# Altium PCB customteensypcb.PcbDoc (part 1 of 2)
Units mil, origin at the board's own origin, x right, y up, seen from the top; angles counter-clockwise.
Board outline 6000 x 4000 mil, 2 copper layers (Top Layer, Bottom Layer); 32 components, 60 nets, 197 pads, 41 vias.
Unrouted connection lines stored in the file: 2.
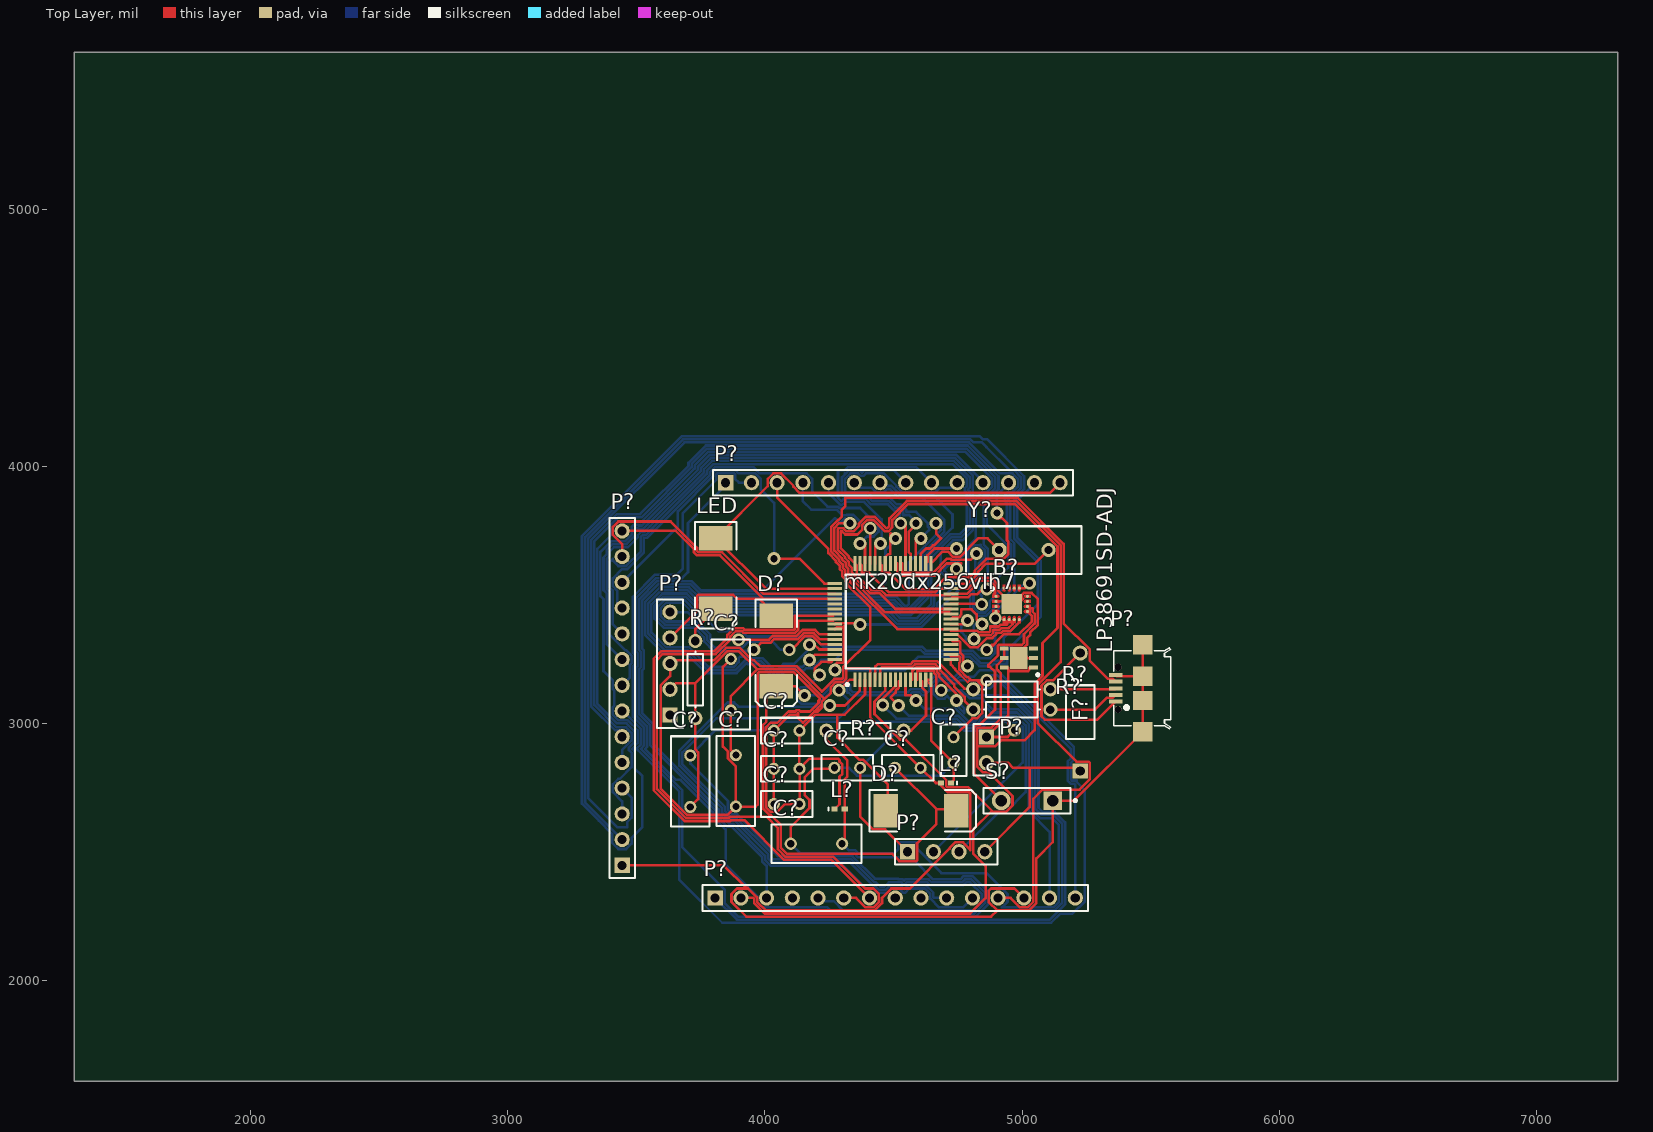
[diagram p0: Top Layer view]
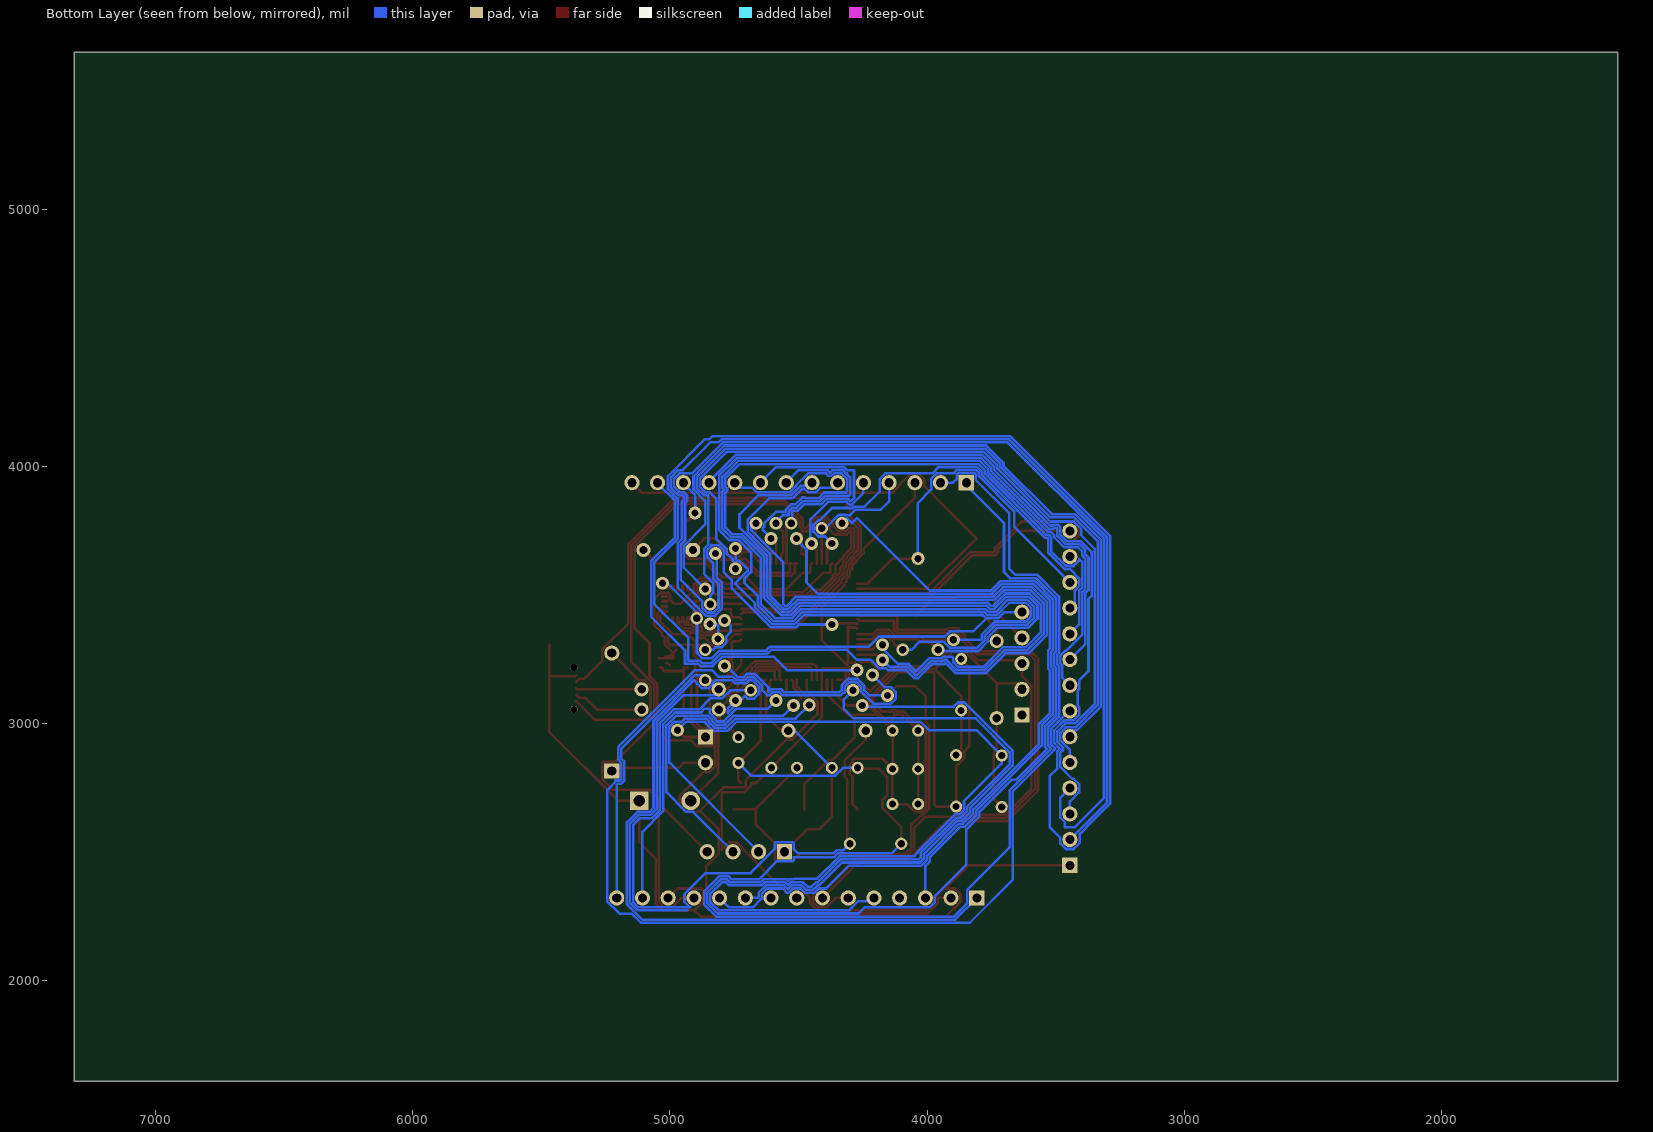
[diagram p1: Bottom Layer view, seen from below]

## Layer stack, top to bottom
Top Solder: solder mask 0.4, Solder Resist, Dk 3.5
Top Layer: signal copper 1.4
Dielectric 1: dielectric 12.6, FR-4, Dk 4.8
Bottom Layer: signal copper 1.4
Bottom Solder: solder mask 0.4, Solder Resist, Dk 3.5

## Board outline
1314.96,1610.24 7314.96,1610.24 7314.96,5610.24 1314.96,5610.24

## Design rules (kind name [scope] priority, off if disabled: settings)
Clearance [All] p1: gap=2 ignorepadtopadclearanceinfootprint=TRUE except(0: Arc-Hole Track-Hole SMDPad-Hole THPad-Hole Via-Hole Fill-Hole Poly-Hole Region-Hole Text-Hole)
PolygonConnect [All] p1: connectstyle=Relief reliefconductorwidth=10 reliefentries=4 polygonreliefangle="90 Angle" airgapwidth=10
RoomDefinition Teensy3.2 [InComponentClass('Teensy3.2')] p1: confinementstyle=ConfineIn formatcopy=TRUE lockcomponents=FALSE outline 2567.92,1549.22 6504.93,1549.22 6504.93,4462.61 2567.92,4462.61
RoutingVias [All] p1: holewidth=28 width=50 viastyle="Through Hole" minholewidth=28 minwidth=50 maxholewidth=28 maxwidth=50
SolderMaskExpansion [All] p1: expansion=4
Width [All] p1: maxlimit=10 minlimit=10 preferedwidth=10
30 further rules are at their usual default settings.

## Classes and differential pairs
component class Teensy3.2: B? C? D? F? L? LED LP38691SD-ADJ mk20dx256vlh7 P? R? S? Y?

## Components (designator, comment, footprint, x,y, rotation, side; value= is the part's Value field where it differs from the comment)
B? "MKL02Z32VFG4" QFN50P300X300X65-17N-D 4959.18,3465.83 r0 top
C? "Cap Pol1" RAD-0.1 4319.89,2828.75 r180 top value=0.1uF
C? "Cap Pol1" RAD-0.2 3886.82,2777.96 r90 top value=2.2uF
C? "Cap Pol1" RAD-0.2 3867.13,3151.98 r270 top value=2.2uF
C? "Cap Pol1" RAD-0.1 4555.32,2828.75 r0 top value=0.1uF
C? "Cap Pol1" RAD-0.2 3709.65,2776.39 r270 top value=2.2uF
C? "Cap Pol1" RAD-0.1 4084.46,2973.24 r180 top value=0.1uF
C? "Cap Pol1" RAD-0.1 4084.46,2687.8 r180 top value=0.1uF
C? "Cap Pol1" RAD-0.2 4200.21,2533.47 r180 top value=2.2uF
C? "Cap Pol1" RAD-0.1 4733.28,2897.65 r270 top value=0.1uF
C? "Cap Pol1" RAD-0.1 4084.46,2824.81 r180 top value=0.1uF
D? "Diode" SMC 4606.31,2661.42 r0 top
D? "Diode" SMC 4044.3,3282.49 r270 top
F? "Fuse 2" PIN-W2/E2.8 5225.4,3045.28 r90 top
L? "Ferrite Inductor" 0402-A 4703.75,2769.69 r180 top value=10mH
L? "Ferrite Inductor" 0402-A 4290.36,2668.12 r0 top value=10mH
LED "Diode" SMC 3808.08,3584.06 r270 top
LP38691SD-ADJ "LP38691SD-ADJ" SON95P300X300X80-7N 4986.59,3255.34 r180 top
mk20dx256vlh7 "mk20dx256vlh7" QFP50P1200X1200X160-64N 4497.06,3396.94 r90 top
P? "Header 5" HDR1X5 3630.91,3033.87 r90 top
P? "Header 14" HDR1X14 3847.25,3937.02 r0 top
P? "Header 15" HDR1X15 3806.31,2322.84 r0 top
P? "Header 14" HDR1X14 3444.88,2449.61 r90 top
P? "Header 4" HDR1X4 4554.54,2502.37 r0 top
P? "MicroUSB" 629105136821 5460.64,3137.8 r90 top
P? "Jumper Normally Close" HDR1X2 4861.23,2948.43 r270 top
R? "Res1" AXIAL-0.3 4388.79,2973.24 r0 top value=470
R? "Res1" AXIAL-0.3 4959.65,3133.87 r180 top value=33
R? "Res1" AXIAL-0.3 4959.65,3055.13 r180 top value=33
R? "Res1" AXIAL-0.3 3729.34,3171.66 r90 top value=470
S? "SW-PB" SPST-2 5018.71,2700.79 r180 top
Y? "ECS-10-13-1" HC-49U 5006.5,3675.2 r0 top

## Footprints (in the part's own frame and the unit in brackets; to place one, negate y for a bottom-side part, rotate by r counter-clockwise, add the part's x,y. Pads: shape width x height; smd on the part's side, far side on the other; paste and mask are expansions set on the pad)
0402-A [mm] "Chip Inductor, Body 1.0x0.5mm, IPC High Density"
  rect 0.6x0.5 smd: 1(-0.5,0) 2(0.5,0)
  silkscreen extent -1.1,-0.15 -1.1,0.15, body extent -0.55,-0.3 0.55,0.3, height 0.55
629105136821 [mm] "Micro USB 2.0 SMT Type B Horizontal 5 Contacts"
  rect 0.4x1.35 smd: 1(-1.3,2.475) 2(-0.65,2.475) 3(0,2.475) 4(0.65,2.475) 5(1.3,2.475)
  rect 1.9x1.9 smd: Shell(-4.3,-0.2) Shell(-1.2,-0.2) Shell(1.2,-0.2) Shell(4.3,-0.2)
  round 0.7 hole 0.7 unplated: ""(-2.075,2.25) ""(2.075,2.25)
  silkscreen extent -4,-2.95 4,2.65, body extent -4,-2.95 4,2.97, height 2.75
AXIAL-0.3 [mm] "Axial Device, Thru-Hole; 2 Leads; 0.3 in Pin Spacing"
  round 1.4 hole 0.85: 1(-3.81,0) 2(3.81,0)
  silkscreen extent -2.77,-0.76 2.77,0.76
HC-49U [mm] "Quartz Crystal, Thru-Hole; 2 Leads; Body 11.35 x 4.65 x 13.46 mm (LxWxH max)"
  oct 1.4x1.4 hole 0.8: 1(-2.44,0)
  round 1.4 hole 0.8: 2(2.44,0)
  silkscreen extent -5.7,-2.35 5.7,2.35
HDR1X2 [mm] "Connector; Header; 2 Position"
  rect 1.5x1.5 hole 0.9: 1(0,0)
  round 1.5 hole 0.9: 2(2.54,0)
  silkscreen extent -1.27,-1.27 3.81,1.27
HDR1X4 [mm] "Connector; Header; 4 Position"
  rect 1.5x1.5 hole 0.9: 1(0,0)
  round 1.5 hole 0.9: 2(2.54,0) 3(5.08,0) 4(7.62,0)
  silkscreen extent -1.27,-1.27 8.89,1.27
HDR1X5 [mm] "Connector; Header; 5 Position"
  rect 1.5x1.5 hole 0.9: 1(0,0)
  round 1.5 hole 0.9: 2(2.54,0) 3(5.08,0) 4(7.62,0) 5(10.16,0)
  silkscreen extent -1.27,-1.27 11.43,1.27
HDR1X14 [mm] "Connector; Header; 14 Position"
  rect 1.5x1.5 hole 0.9: 1(0,0)
  round 1.5 hole 0.9: 2(2.54,0) 3(5.08,0) 4(7.62,0) 5(10.16,0) 6(12.7,0) 7(15.24,0) 8(17.78,0) 9(20.32,0) 10(22.86,0) 11(25.4,0) 12(27.94,0) 13(30.48,0) 14(33.02,0)
  silkscreen extent -1.27,-1.27 34.29,1.27
HDR1X15 [mm] "Connector; Header; 15 Position"
  rect 1.5x1.5 hole 0.9: 1(0,0)
  round 1.5 hole 0.9: 2(2.54,0) 3(5.08,0) 4(7.62,0) 5(10.16,0) 6(12.7,0) 7(15.24,0) 8(17.78,0) 9(20.32,0) 10(22.86,0) 11(25.4,0) 12(27.94,0) 13(30.48,0) 14(33.02,0) 15(35.56,0)
  silkscreen extent -1.27,-1.27 36.83,1.27
PIN-W2/E2.8 [mm] "Thru-Hole; 2 Leads"
  rect 1.5x1.5 hole 0.9: 1(-5.825,0)
  round 1.5 hole 0.9: 2(5.825,0)
  silkscreen extent -2.65,-1.4 2.65,1.4
QFN50P300X300X65-17N-D [mm]
  round 0.3 smd: 1(-1.55,0.75) 2(-1.55,0.25) 3(-1.55,-0.25) 4(-1.55,-0.75) 5(-0.75,-1.55) 6(-0.25,-1.55) 7(0.25,-1.55) 8(0.75,-1.55) 9(1.55,-0.75) 10(1.55,-0.25) 11(1.55,0.25) 12(1.55,0.75) 13(0.75,1.55) 14(0.25,1.55) 15(-0.25,1.55) 16(-0.75,1.55)
  rrect0% 2x2 smd: 17(0,0)
  Top Layer region: -0.6,1.9 -0.588,1.35 -0.635,1.235 -0.75,1.188 -0.865,1.235 -0.912,1.35 -0.9,1.35 -0.9,1.9 -0.6,1.9
  Top Layer region: -0.1,1.9 -0.088,1.35 -0.135,1.235 -0.25,1.188 -0.365,1.235 -0.412,1.35 -0.4,1.35 -0.4,1.9 -0.1,1.9
  Top Layer region: 0.4,1.9 0.412,1.35 0.365,1.235 0.25,1.188 0.135,1.235 0.088,1.35 0.1,1.35 0.1,1.9 0.4,1.9
  Top Layer region: 0.9,1.9 0.912,1.35 0.865,1.235 0.75,1.188 0.635,1.235 0.588,1.35 0.6,1.35 0.6,1.9 0.9,1.9
  Top Layer region: 1.9,0.6 1.35,0.588 1.235,0.635 1.188,0.75 1.235,0.865 1.35,0.912 1.35,0.9 1.9,0.9 1.9,0.6
  Top Layer region: 1.9,0.1 1.35,0.088 1.235,0.135 1.188,0.25 1.235,0.365 1.35,0.412 1.35,0.4 1.9,0.4 1.9,0.1
  Top Layer region: 1.9,-0.4 1.35,-0.412 1.235,-0.365 1.188,-0.25 1.235,-0.135 1.35,-0.088 1.35,-0.1 1.9,-0.1 1.9,-0.4
  Top Layer region: 1.9,-0.9 1.35,-0.912 1.235,-0.865 1.188,-0.75 1.235,-0.635 1.35,-0.588 1.35,-0.6 1.9,-0.6 1.9,-0.9
  Top Layer region: 0.6,-1.9 0.588,-1.35 0.635,-1.235 0.75,-1.188 0.865,-1.235 0.912,-1.35 0.9,-1.35 0.9,-1.9 0.6,-1.9
  Top Layer region: 0.1,-1.9 0.088,-1.35 0.135,-1.235 0.25,-1.188 0.365,-1.235 0.412,-1.35 0.4,-1.35 0.4,-1.9 0.1,-1.9
  Top Layer region: -0.4,-1.9 -0.412,-1.35 -0.365,-1.235 -0.25,-1.188 -0.135,-1.235 -0.088,-1.35 -0.1,-1.35 -0.1,-1.9 -0.4,-1.9
  Top Layer region: -0.9,-1.9 -0.912,-1.35 -0.865,-1.235 -0.75,-1.188 -0.635,-1.235 -0.588,-1.35 -0.6,-1.35 -0.6,-1.9 -0.9,-1.9
  Top Layer region: -1.9,-0.6 -1.35,-0.588 -1.235,-0.635 -1.188,-0.75 -1.235,-0.865 -1.35,-0.912 -1.35,-0.9 -1.9,-0.9 -1.9,-0.6
  Top Layer region: -1.9,-0.1 -1.35,-0.088 -1.235,-0.135 -1.188,-0.25 -1.235,-0.365 -1.35,-0.412 -1.35,-0.4 -1.9,-0.4 -1.9,-0.1
  Top Layer region: -1.9,0.4 -1.35,0.412 -1.235,0.365 -1.188,0.25 -1.235,0.135 -1.35,0.088 -1.35,0.1 -1.9,0.1 -1.9,0.4
  Top Layer region: -1.9,0.9 -1.35,0.912 -1.235,0.865 -1.188,0.75 -1.235,0.635 -1.35,0.588 -1.35,0.6 -1.9,0.6 -1.9,0.9
  silkscreen extent -2.02,1.38 -1.77,1.62
QFP50P1200X1200X160-64N [mm]
  rect 1.475x0.3 smd: 1(-5.738,3.75) 2(-5.738,3.25) 3(-5.738,2.75) 4(-5.738,2.25) 5(-5.738,1.75) 6(-5.738,1.25) 7(-5.738,0.75) 8(-5.738,0.25) 9(-5.738,-0.25) 10(-5.738,-0.75) 11(-5.738,-1.25) 12(-5.738,-1.75) 13(-5.738,-2.25) 14(-5.738,-2.75) 15(-5.738,-3.25) 16(-5.738,-3.75) 33(5.738,-3.75) 34(5.738,-3.25) 35(5.738,-2.75) 36(5.738,-2.25) 37(5.738,-1.75) 38(5.738,-1.25) 39(5.738,-0.75) 40(5.738,-0.25) 41(5.738,0.25) 42(5.738,0.75) 43(5.738,1.25) 44(5.738,1.75) 45(5.738,2.25) 46(5.738,2.75) 47(5.738,3.25) 48(5.738,3.75)
  rect 0.3x1.475 smd: 17(-3.75,-5.738) 18(-3.25,-5.738) 19(-2.75,-5.738) 20(-2.25,-5.738) 21(-1.75,-5.738) 22(-1.25,-5.738) 23(-0.75,-5.738) 24(-0.25,-5.738) 25(0.25,-5.738) 26(0.75,-5.738) 27(1.25,-5.738) 28(1.75,-5.738) 29(2.25,-5.738) 30(2.75,-5.738) 31(3.25,-5.738) 32(3.75,-5.738) 49(3.75,5.738) 50(3.25,5.738) 51(2.75,5.738) 52(2.25,5.738) 53(1.75,5.738) 54(1.25,5.738) 55(0.75,5.738) 56(0.25,5.738) 57(-0.25,5.738) 58(-0.75,5.738) 59(-1.25,5.738) 60(-1.75,5.738) 61(-2.25,5.738) 62(-2.75,5.738) 63(-3.25,5.738) 64(-3.75,5.738)
  silkscreen extent -6.35,-4.65 4.65,4.65
RAD-0.1 [mm] "Radial Cap, Thru-Hole; 2 Leads; 0.1 in Pin Spacing"
  round 1.2 hole 0.7: 1(-1.27,0) 2(1.27,0)
  silkscreen extent -2.54,-1.27 2.54,1.27
RAD-0.2 [mm] "Radial Cap, Thru-Hole; 2 Leads; 0.2 in Pin Spacing"
  round 1.2 hole 0.7: 1(-2.54,0) 2(2.54,0)
  silkscreen extent -4.44,-1.91 4.44,1.91
SMC [mm] "DO-214-AB/SMC; 2 C-Bend Leads; Body 7.9 x 5.9 mm, inc. leads (LxW)"
  rect 2.4x3.3 smd: 1(-3.475,0) 2(3.475,0)
  silkscreen extent -5.07,-2.05 5.43,2.05
SON95P300X300X80-7N [mm]
  rect 0.85x0.4 smd: 1(-1.45,0.95) 2(-1.45,0) 3(-1.45,-0.95) 4(1.45,-0.95) 5(1.45,0) 6(1.45,0.95)
  rect 1.7x2.2 smd: 7(0,0)
  silkscreen extent -2,1.53 -1.75,1.77
SPST-2 [mm] "Switch; 2 Leads"
  rect 1.85x1.85 hole 1.1: 1(-2.54,0)
  round 1.85 hole 1.1: 2(2.54,0)
  silkscreen extent -4.89,-1.27 4.28,1.27

## Part data
B?: "Freescale MKL02Z32VFG4, 32bit ARM Cortex M0 Microcontroller, 48MHz, 32 kB Flash, 16-Pin QFN", Manufacturer_Name=Nexperia, RS Part Number=7884723, Datasheet Link=http://cache.nxp.com/files/32bit/doc/data_sheet/KL02P32M48SF0.pdf, Geometry.Height=0.65mm, Manufacturer_Part_Number=MKL02Z32VFG4, Supplier_Name=RS
C? C? C? C? C? C? C? C? C? C?: "Polarized Capacitor (Radial)", LatestRevisionDate=17-Jul-2002, LatestRevisionNote="Re-released for DXP Platform.", PackageDescription="Polarized Capacitor (Radial); 2 Leads", PackageReference=RB7.6-15, Published=8-Jun-2000, Publisher="Altium Limited"
D? D? LED: "Default Diode", Code_JEDEC=DO-214-AB, LatestRevisionDate=17-Jul-2002, LatestRevisionNote="Re-released for DXP Platform.", PackageDescription="DO-214-AB/SMC; 2 C-Bend Leads; Body 7.9 x 5.9 mm, inc. leads (LxW)", PackageReference=SMC, PackageVersion=Sep-1996, Published=8-Jun-2000, Publisher="Altium Limited"
F?: "Fuse", LatestRevisionDate=17-Jul-2002, LatestRevisionNote="Re-released for DXP Platform.", PackageDescription="Thru-Hole; 2 Leads", PackageReference=PIN-W2/E2.8, Published=8-Jun-2000, Publisher="Altium Limited"
L? L?: library part Inductor, "Inductor", Code_IEC=1005, Code_JEITA=0402, LatestRevisionDate=29-May-2009, LatestRevisionNote="IPC-7351 Footprint Added.", PackageDescription="Chip Inductor", PackageReference=0402-A, Published=8-Jun-2000, Publisher="Altium Limited"
LP38691SD-ADJ: "500mA LDO Regulator Adj.,LP38691SD-ADJ", Manufacturer_Name="Texas Instruments", Mouser Part Number=926-LP38691SD-ADJ, Datasheet Link=http://www.ti.com/lit/ds/symlink/lp38691-adj.pdf, Geometry.Height=0.8mm, Manufacturer_Part_Number=LP38691SD-ADJ, Supplier_Name=Mouser
mk20dx256vlh7: "MK20DX256VLH7, ARM Cortex M4 MCU 72MHz 256 kB Flash, 64 kB RAM, USB CAN I2C 64-Pin LQFP", Manufacturer_Name=Nexperia, RS Part Number=7862120P, Datasheet Link=https://www.pjrc.com/teensy/K20P64M72SF1.pdf, Geometry.Height=1.6mm, Manufacturer_Part_Number=mk20dx256vlh7, Supplier_Name=RS
P?: "Header, 5-Pin", LatestRevisionDate=17-Jul-2002, LatestRevisionNote="Re-released for DXP Platform.", Publisher="Altium Limited"
P? P?: "Header, 14-Pin", LatestRevisionDate=17-Jul-2002, LatestRevisionNote="Re-released for DXP Platform.", Publisher="Altium Limited"
P?: "Header, 15-Pin", LatestRevisionDate=17-Jul-2002, LatestRevisionNote="Re-released for DXP Platform.", Publisher="Altium Limited"
P?: "Header, 4-Pin", LatestRevisionDate=17-Jul-2002, LatestRevisionNote="Re-released for DXP Platform.", Publisher="Altium Limited"
P?: library part 629105136821, "Micro USB 2.0 SMT Type B Horizontal 5 Contacts WR-COM", ComponentLink1Description=Manufacturer, ComponentLink1URL=http://www.we-online.de, ComponentLink2Description=Datasheet, ComponentLink2URL=http://katalog.we-online.de/em/datasheet/629105136821.pdf, Construction=SMT, Gender=Receptacle, Interface Type="Type B", Part Number=629105136821, Published Date="April 2017", Publisher="Wurth Elektronik", Sub-Family="Micro USB 2.0", Type=Horizontal
P?: library part "Header 2", "Header, 2-Pin", LatestRevisionDate=17-Jul-2002, LatestRevisionNote="Re-released for DXP Platform.", Publisher="Altium Limited"
R? R? R? R?: "Resistor", LatestRevisionDate=17-Jul-2002, LatestRevisionNote="Re-released for DXP Platform.", PackageDescription="Axial Device, Thru-Hole; 2 Leads; 0.3 in Pin Spacing", PackageReference=AXIAL-0.3, Published=8-Jun-2000, Publisher="Altium Limited"
S?: "Switch", LatestRevisionDate=17-Jul-2002, LatestRevisionNote="Re-released for DXP Platform.", PackageDescription="Switch; 2 Leads", PackageReference=SPST-2, Published=24-Mar-1999, Publisher="Altium Limited"
Y?: "Crystal Oscillator", ComponentLink1Description="Manufacturer Link", ComponentLink1URL=http://www.ecsxtal.com/, ComponentLink2Description=Datasheet, ComponentLink2URL=http://www.ecsxtal.com/pdf2/HC49U.PDF, DatasheetDocument=18-Apr-2000, PackageReference=HC-49U, Published=17-Jul-2002, Publisher="Altium Limited"

## Via types
v1: diameter 50, hole 28, Top Layer to Bottom Layer, 41 vias

## Nets (pads, with @x,y where several pads share a name; then routed paths per layer and width w, separated by ;. In a path a pad name is that pad's centre, name@x,y a point inside that pad or via, vN(x,y) a via of type N, cw(c..) or ccw(c..) an arc to the next point about the centre after c; other vN are vias at no path point)
3.3v: B?.1 C?.1@3867.13,3251.98 C?.1@3886.82,2677.96 C?.1@4134.46,2687.8 C?.1@4134.46,2824.81 C?.1@4134.46,2973.24 D?.1@4469.5,2661.42 L?.1@4270.68,2668.12 LP38691SD-ADJ.4 LP38691SD-ADJ.5 mk20dx256vlh7.3 mk20dx256vlh7.7 mk20dx256vlh7.30 mk20dx256vlh7.48 P?.2@3906.31,2322.84 P?.3@3630.91,3233.87 P?.3@4047.25,3937.02 | length 12218.7
  Top Layer w10: C?.1@3867.13,3251.98 3836.51,3221.35 3836.51,2911.3 3856.2,2891.61 3856.2,2865.28 3886.82,2834.65 C?.1@3886.82,2677.96 ; P?.2@3906.31,2322.84 3954.65,2322.84 3957.78,2319.71 3957.78,2302.74 3998.21,2262.31 4797.44,2262.31 4857.78,2322.66 4857.78,2447.47 4809.36,2495.88 4809.36,2589.2 4881.89,2661.73 ; P?.3@4047.25,3937.02 4047.25,3878.78 4246.06,3679.97 4246.06,3663 4276.01,3633.05 4276.01,3628.37 4290.08,3614.3 4290.08,3602.01 4300.51,3591.58 4300.51,3572.87 4312.16,3561.23 4312.16,3554.84 4319.19,3547.81 4319.19,3541.38 4409.45,3451.12 4409.45,3325.79 4303.65,3219.99 4303.65,3179.33 4298.26,3173.93 4269.97,3173.93 4221.03,3124.99 4122.1,3223.92 3980.8,3223.92 3958.33,3246.39 3950.93,3246.39 3902.73,3294.6 3849.48,3294.6 3801.28,3246.39 3643.44,3246.39 P?.3@3630.91,3233.87 3630.91,3185.52 3594.39,3149 3594.39,2748.35 3696.97,2645.76 3854.62,2645.76 C?.1@3886.82,2677.96 ; L?.1@4270.68,2668.12 4289.61,2687.05 4289.61,2794.27 4300.51,2805.17 4300.51,2841.43 4289.61,2852.33 4289.61,2858.69 4284.09,2864.22 4172.29,2864.22 C?.1@4133.67,2825.6 ; mk20dx256vlh7.3@4388.79,3171.03 4388.79,3114.18 4310.05,3035.44 4280.52,3035.44 ; mk20dx256vlh7.7@4467.53,3171.03 4467.53,3128.33 4425.69,3086.49 4425.69,3037.46 4524.47,2938.68 4546.63,2938.68 4704.62,2780.69 4704.62,2756.95 4708.72,2752.85 4790.77,2752.85 4881.89,2661.73 ; D?.1@4477.37,2668.12 4477.37,2764.57 4382.57,2859.37 4368.01,2859.37 4281.35,2946.03 4281.35,2991.69 4280.52,2992.52 4280.52,3035.44 ; B?.1@4898.16,3495.36 4890.24,3505.2 4894.19,3509.16 4894.19,3536.87 4875.45,3555.61 4836.63,3555.61 4786.22,3505.2 mk20dx256vlh7.30@4722.96,3505.2 4717.38,3499.62 4470.36,3499.62 4450.1,3519.88 4413.44,3519.88 4367.19,3566.14 4367.19,3575.82 4356.2,3586.81 4356.2,3616.06 mk20dx256vlh7.48@4349.42,3622.84 4326.08,3646.18 4326.08,3650.87 4294.06,3682.88 4294.06,3747.85 4300.16,3747.85 4312.48,3735.53 4359.56,3735.53 4377.44,3753.4 4377.44,3773.09 4396.19,3791.84 4422.69,3791.84 4466.68,3747.85 4479.37,3747.85 4495.55,3764.03 4495.55,3792.77 4556.73,3853.95 4972.69,3853.95 5137.13,3689.52 5137.13,3372.2 5078.86,3313.93 5078.86,3185.89 5048.24,3155.26 5048.24,2974.81 5008.87,2935.44 4917.19,2935.44 4893.66,2911.91 4828.8,2911.91 4824.7,2916.01 ; LP38691SD-ADJ.4@4929.51,3292.75 LP38691SD-ADJ.5@4929.51,3255.34 4901.58,3227.42 4901.58,3211.81 4905.77,3207.62 4905.77,3207.17 4917.22,3195.72 4917.22,3021.4 4880.79,2984.96 4828.8,2984.96 4824.7,2980.86 4824.7,2916.01 ; C?.1@3886.82,2677.96 3963.98,2677.96 3972.34,2686.31 3972.34,3195.82 3976.44,3199.92 4112.16,3199.92 4212.6,3099.48 4212.6,3093.72 4207.97,3089.09 4207.97,3080.69 4174.72,3047.44 4138.45,3047.44 4133.23,3052.66 4123.29,3052.66 4118.07,3047.44 4091.69,3047.44 4048.11,3003.86 4021.77,3003.86 4003.83,2985.92 4003.83,2675.12 4021.77,2657.18 4047.14,2657.18 4077.76,2687.8 C?.1@4134.46,2687.8 C?.1@4134.46,2824.81 C?.1@4133.67,2825.6 ; C?.1@4133.67,2825.6 4133.67,2972.45 C?.1@4134.46,2973.24 4196.66,3035.44 4280.52,3035.44 ; 4824.7,2916.01 4824.7,2833.3 4846.1,2811.91 4869,2811.91 4962.13,2718.78 4962.13,2682.81 4936.69,2657.38 4886.24,2657.38 4881.89,2661.73
GND: B?.2 B?.17 C?.2@3709.65,2676.39 C?.2@3867.13,3051.98 C?.2@3886.82,2877.96 C?.2@4034.46,2687.8 C?.2@4034.46,2824.81 C?.2@4034.46,2973.24 C?.2@4605.32,2828.75 L?.2@4684.06,2769.69 LP38691SD-ADJ.2 LP38691SD-ADJ.7 mk20dx256vlh7.4 mk20dx256vlh7.31 mk20dx256vlh7.47 P?.1@3444.88,2449.61 P?.2@3630.91,3133.87 P?.5@5363.2,3188.98 P?.13@5006.31,2322.84 P?.Shell R?.1@3729.34,3021.66 S?.1 | length 9287.8
  Top Layer w10: P?.1@3444.88,2449.61 3839.19,2449.61 3929.42,2359.37 ; P?.2@3630.91,3133.87 3654.53,3157.49 3729.34,3157.49 ; C?.2@3709.65,2676.39 3740.28,2707.01 3740.28,2889.07 3729.34,2900.01 R?.1@3729.34,3021.66 3729.34,3157.49 ; C?.2@3886.82,2877.96 3867.13,2897.65 C?.2@3867.13,3051.98 3867.13,3107.59 3971.47,3211.92 ; C?.2@4034.46,2687.8 4033.67,2688.59 4033.67,2825.6 4034.46,2826.39 C?.2@4034.46,2973.24 4096.66,3035.44 4123.04,3035.44 4128.26,3040.66 4128.26,3022.74 ; mk20dx256vlh7.47@4369.1,3622.84 4375.88,3616.06 4375.88,3586.81 4405.14,3586.81 4480.32,3511.62 4662.14,3511.62 4675.41,3524.89 mk20dx256vlh7.31@4722.96,3524.89 4788.94,3524.89 4831.66,3567.61 4880.42,3567.61 4906.19,3541.84 4906.19,3518.82 B?.17@4949.34,3475.68 ; 4797.36,2507.88 4797.36,2511.2 ; B?.2@4898.16,3475.68 B?.17@4949.34,3475.68 ; LP38691SD-ADJ.7@4973.98,3288.28 LP38691SD-ADJ.7@4986.59,3275.67 ; LP38691SD-ADJ.7@5000.01,3228.35 5003.36,3230.63 LP38691SD-ADJ.7@5011.42,3236.1 ; P?.13@5006.31,2336.23 P?.13@5006.31,2322.84 4969.78,2359.37 4879.06,2359.37 4869.78,2350.09 4869.78,2307.71 4903.18,2274.31 ; LP38691SD-ADJ.7@5018.16,3260.56 5004.99,3262.48 5003.82,3262.65 4998.89,3263.38 LP38691SD-ADJ.7@4986.59,3275.67 ; LP38691SD-ADJ.2@5043.68,3255.34 LP38691SD-ADJ.7@4986.59,3255.34 LP38691SD-ADJ.7@4986.59,3275.67 ; P?.5@5363.2,3188.98 5367.13,3185.05 P?.Shell@5468.51,3185.05 ; P?.Shell@5468.51,3307.09 P?.Shell@5468.51,3185.05 ; 3729.34,3157.49 3854.45,3282.6 3897.76,3282.6 3968.43,3211.92 3971.47,3211.92 ; 3929.42,2359.37 3891.18,2359.37 3869.78,2337.97 3869.78,2307.71 3927.18,2250.31 4879.18,2250.31 4903.18,2274.31 ; 3929.42,2359.37 3932.26,2362.2 3969.78,2324.68 3969.78,2307.71 4003.18,2274.31 4426.41,2274.31 4454.84,2302.74 4454.84,2323.03 4491.18,2359.37 4563.19,2359.37 4718.01,2514.18 4718.01,2517.5 4739.41,2538.9 4769.67,2538.9 4797.36,2511.2 ; 3971.47,3211.92 4117.13,3211.92 4232.28,3096.77 4232.28,3096.44 ; 4128.26,3022.74 4147.14,3003.86 4148.11,3003.86 4166.99,3022.74 ; 4128.26,3022.74 4166.99,3022.74 ; 4166.99,3022.74 4191.69,3047.44 ; 4191.69,3047.44 4205.71,3047.44 4219.97,3061.7 4219.97,3075.72 ; 4191.69,3047.44 4219.97,3075.72 ; 4219.97,3075.72 4219.97,3084.12 4232.28,3096.44 ; 4232.28,3096.44 4256.2,3120.35 4256.2,3143.18 4274.94,3161.93 4301.45,3161.93 4302.34,3161.04 4315.65,3174.36 4315.65,3215.02 4315.7,3215.07 4406.01,3215.07 4408.47,3212.61 mk20dx256vlh7.4@4408.47,3171.03 4408.47,3134.18 4408.79,3133.87 4408.79,3025.28 C?.2@4605.32,2828.75 4664.38,2769.69 L?.2@4684.06,2769.69 4684.06,2760.54 4711.22,2733.39 4793.26,2733.39 4797.36,2729.28 4797.36,2511.2 ; 4903.18,2274.31 5026.41,2274.31 5054.84,2302.74 5054.84,2476.09 5118.71,2539.97 S?.1@5118.71,2700.79 5200.8,2700.79 P?.Shell@5468.51,2968.51 P?.Shell@5468.51,3090.56 P?.Shell@5468.51,3185.05 ; B?.17@4949.34,3475.68 B?.17@4959.18,3465.83 4983.55,3465.83 5003.23,3485.52 4998.94,3485.52 4998.94,3500.91 5006.78,3508.75 5036.4,3508.75 5060.62,3484.53 5060.62,3384.74 5030.82,3354.94 5030.82,3345 5018.86,3333.03 5018.86,3307.93 LP38691SD-ADJ.7@4986.59,3275.67
NetB?_4: B?.4 B?.13 mk20dx256vlh7.34 P?.5@3630.91,3433.87 | length 3171.2
  Top Layer w10: mk20dx256vlh7.34@4625.01,3622.84 4631.79,3629.62 4631.79,3654.78 4658.11,3681.1 v1(4744.09,3681.1) ; v1(4895.32,3409.89) 4892.04,3409.89 4881.89,3420.04 B?.4@4898.16,3436.31 ; B?.13@4988.71,3526.86 5009.36,3526.86 v1(5028.66,3546.16)
  Bottom Layer w10: P?.5@3630.91,3433.87 3643.44,3433.87 3643.44,3430.95 3644.58,3429.82 3648.1,3433.34 3700.48,3433.34 3724.48,3409.34 3769.78,3409.34 ; v1(4744.09,3681.1) 4744.09,3639.49 4738.97,3634.36 4730.84,3634.36 4697.49,3601.01 4697.49,3592.88 4745.58,3544.79 4669.67,3468.88 4669.67,3454.63 4601.44,3386.39 4514.71,3386.39 4479.76,3421.34 3781.78,3421.34 3769.78,3409.34 ; v1@5008.98,3546.16 4890.79,3427.97 4895.32,3423.44 v1(4895.32,3409.89) 4894.19,3411.01 4894.19,3274.14 4875.45,3255.39 4835.6,3255.39 4806.65,3284.34 4625.65,3284.34 4610.59,3299.4 4226.17,3299.4 4186.48,3339.09 3930.58,3339.09 3910.89,3358.77 3820.35,3358.77 3769.78,3409.34
NetB?_6: B?.6 mk20dx256vlh7.23 P?.4@5363.2,3163.39 | length 2676.9
  Top Layer w10: B?.6@4949.34,3404.81 4942.56,3398.03 4942.56,3388.13 4938.46,3384.03 4914.72,3384.03 4908.57,3377.89 4882.06,3377.89 4880.3,3379.65 4875.71,3379.65 4875.71,3359.02 4872.65,3355.96 4830.46,3355.96 4825.27,3361.14 4722.96,3361.14 mk20dx256vlh7.23@4722.96,3367.41 4515,3367.41 4331.19,3551.23 4331.19,3560.91 4321.28,3570.81 4319.54,3570.81 4312.51,3577.84 4312.51,3596.55 4302.08,3606.98 4302.08,3619.27 4288.01,3633.34 4288.01,3638.03 4258.06,3667.97 4258.06,3765.94 4284.26,3792.14 4285.2,3792.14 4298.7,3805.64 4298.7,3832.14 4312.2,3845.64 4312.2,3877.95 4982.63,3877.95 5161.13,3699.46 5161.13,3390.55 5261.93,3289.74 5261.93,3245.9 5333.72,3174.11 5352.48,3174.11 P?.4@5363.2,3163.39
NetB?_7: B?.7 mk20dx256vlh7.25 | length 477.3
  Top Layer w10: mk20dx256vlh7.25@4722.96,3406.78 4729.74,3413.56 4754.9,3413.56 4759,3417.66 4759,3420.41 4763.78,3425.2 4763.78,3444.88 4803.15,3444.88 4822.83,3425.2 4822.83,3405.51 4840.39,3387.96 v1(4843.71,3387.96) v1@4843.71,3404.32 ; v1@4822.54,3331.4 4824.29,3331.4 4836.85,3343.96 4877.62,3343.96 4887.71,3354.05 4887.71,3365.53 4913.19,3365.53 4919.69,3372.03 4947.53,3372.03 4962.24,3386.75 4962.24,3398.03 B?.7@4969.02,3404.81
  Bottom Layer w10: v1(4812.02,3329.14) 4812.02,3380.17 4819.8,3387.96 v1(4843.71,3387.96)
NetB?_8: B?.8 mk20dx256vlh7.22 | length 336.2
  Top Layer w10: mk20dx256vlh7.22@4722.96,3347.72 4748.18,3347.72 4798.76,3297.14 4826.69,3297.14 4861.5,3331.96 4882.59,3331.96 ; 4885.06,3334.43 4899.71,3349.08 4899.71,3353.53 4918.16,3353.53 4924.66,3360.03 4953.83,3360.03 4988.71,3394.91 B?.8@4988.71,3404.81
NetB?_9: B?.9 mk20dx256vlh7.24 | length 629.9
  Top Layer w10: mk20dx256vlh7.24@4722.96,3387.09 4771.54,3387.09 4772.65,3388.2 v1@4792.33,3388.2 ; v1@4857.69,3285.14 4859.06,3286.51 v1@4859.2,3286.51 ; v1@4862.2,3283.31 v1@4862.2,3283.51 ; 4881.91,3307.09 v1(4862.19,3287.39) ; 4885.76,3307.09 v1@4866.07,3287.39 ; B?.9@5020.2,3436.31 5036.62,3419.89 5036.62,3396.27 4988.39,3348.03 4929.63,3348.03 4868.11,3286.51 v1@4865.19,3286.51 ; v1@4859.2,3286.51 v1@4862.19,3283.52 ; v1@4859.2,3286.51 v1@4862.19,3286.51 ; v1@4862.19,3283.52 v1@4862.19,3286.51 ; v1@4862.2,3286.51 v1@4865.19,3286.51 ; v1@4862.19,3286.51 v1(4862.19,3287.39) ; v1@4862.2,3286.51 4862.2,3283.53 v1@4865.19,3286.51 ; v1@4862.2,3286.51 v1(4862.19,3287.39) ; v1(4862.19,3287.39) v1@4866.07,3287.39 ; v1@4865.19,3286.51 v1@4866.07,3287.39
  Bottom Layer w10: v1(4787.78,3401.18) 4785.63,3401.18 4763.79,3379.34 4763.79,3356.19 4780.02,3339.96 4780.02,3315.89 4798.76,3297.14 4822.83,3297.14 4832.58,3287.39 4852.44,3287.39 4862.19,3277.64 v1(4862.19,3287.39)
NetB?_10: B?.10 S?.2 | length 1004.1
  Top Layer w10: S?.2@4918.71,2700.79 4812.7,2806.8 4812.7,2985.83 4823.83,2996.96 4836.7,2996.96 4894.19,3054.45 4894.19,3201.78 4893.77,3202.2 4875.03,3220.97 4868.02,3220.97 4868.02,3228.28 4905.77,3266.03 4905.77,3303.52 4909.87,3307.62 4949.14,3307.62 4950.74,3306.02 4998.09,3306.02 5006.86,3314.78 5006.86,3347.94 5048.62,3389.71 5048.62,3427.57 5040.98,3435.21 5040.98,3449.21 5026.98,3449.21 B?.10@5020.2,3455.99
NetC?_1: C?.1@4300.21,2533.47 L?.2@4310.05,2668.12 mk20dx256vlh7.13 R?.1@4238.79,2973.24 | length 2933.6
  Top Layer w10: R?.1@4238.79,2973.24 4238.79,2937.8 4319.89,2856.7 4319.89,2794.5 4310.05,2784.65 L?.2@4310.05,2668.12 4310.05,2543.31 C?.1@4300.21,2533.47 ; mk20dx256vlh7.13@4585.64,3171.03 4592.42,3171.03 4592.42,3207.07 4653.5,3207.07 4657.6,3202.97 4657.6,3196.75 4665.36,3188.98 4665.36,3129.93 v1(4685.05,3129.93)
  Bottom Layer w10: C?.1@4300.21,2533.47 4325.04,2508.64 4350.58,2508.64 4362.58,2496.64 4503.11,2496.64 4518.01,2511.54 4518.01,2534.8 4522.11,2538.9 4586.96,2538.9 4591.06,2534.8 4591.06,2514.17 4685.86,2419.37 4861.44,2419.37 4942.84,2337.97 4942.84,2307.71 4921.44,2286.31 5121.44,2286.31 5142.84,2307.71 5142.84,2606.8 5116.26,2633.38 5069.45,2633.38 5039.37,2663.46 5039.37,3001.1 4984.68,3055.79 4884.45,3055.79 4840.94,3099.31 4795.34,3099.31 4764.72,3129.93 v1(4685.05,3129.93)
NetC?_1: C?.1@4505.32,2828.75 D?.2 mk20dx256vlh7.21 | length 2822.8
  Top Layer w10: v1(4153.54,3110.24) 4118.1,3145.68 D?.2@4044.3,3145.68 4004.93,3106.31 4004.93,3007.42 3991.83,2994.33 3991.83,2670.15 4016.8,2645.18 4022.46,2645.18 4061.58,2606.06 4061.58,2517.47 4084.21,2494.85 4493.1,2494.85 4522.11,2465.84 4586.96,2465.84 4591.06,2469.94 4591.06,2534.8 4665.95,2609.69 4665.95,2668.12 ; C?.1@4505.32,2828.75 4665.95,2668.12 ; mk20dx256vlh7.21@4722.96,3328.04 4729.74,3321.26 4754.9,3321.26 4759,3317.16 4759,3274.2 4759.87,3274.2 4771,3263.07 4771,3240.81 4783.46,3228.35 v1(4787.78,3224.02) ; D?.2@4750.99,2668.12 4665.95,2668.12
  Bottom Layer w10: v1(4153.54,3110.24) 4223.25,3110.24 4244.2,3131.18 4244.2,3148.15 4269.97,3173.93 4306.42,3173.93 4332.2,3148.15 4332.2,3131.18 4340.83,3122.55 4556.39,3122.55 4568.39,3134.55 4604.84,3134.55 4616.14,3123.25 4616.14,3140.22 4669.21,3193.29 4700.88,3193.29 4712.88,3181.29 4736.41,3181.29 4783.46,3228.34 v1(4787.78,3224.02)
NetC?_2: C?.2@4100.21,2533.47 C?.2@4269.89,2828.75 C?.2@4733.28,2847.65 L?.1@4723.43,2769.69 mk20dx256vlh7.15 mk20dx256vlh7.16 P?.2@3947.25,3937.02 | length 5546.7
  Top Layer w10: C?.2@4100.21,2533.47 4100.21,2598.93 4173.08,2671.8 4173.08,2703.8 4154.46,2722.42 4154.46,2791.27 4188.79,2825.6 4250.99,2825.6 4254.14,2828.75 C?.2@4269.89,2828.75 ; mk20dx256vlh7.16@4644.69,3171.03 mk20dx256vlh7.15@4625.01,3171.03 4645.68,3150.36 4645.68,2935.24 C?.2@4733.28,2847.65 4733.28,2779.53 L?.1@4723.43,2769.69
  Bottom Layer w10: P?.2@3947.25,3937.02 3898.42,3937.02 3883.78,3951.66 3883.78,3969.44 3879.68,3973.54 3814.83,3973.54 3810.72,3969.44 3810.72,3948.52 3681.1,3818.9 3681.1,3603.59 3655.9,3578.39 3571.05,3578.39 3486.39,3493.73 3486.39,3276.73 3493.41,3269.71 3493.41,3229.51 3486.39,3222.48 3486.39,3027.64 3529.41,2984.62 3529.41,2914.59 3517.41,2902.59 3517.41,2902.24 3679.03,2740.62 3679.03,2519.07 3842.84,2355.27 3842.84,2303.28 3895.81,2250.31 4819.38,2250.31 4866.84,2297.77 4866.84,2347.91 4807.38,2407.37 4772.29,2407.37 4760.29,2395.37 4653.32,2395.37 4582.85,2465.84 4522.11,2465.84 4518.01,2469.94 4518.01,2481.74 4360.51,2481.74 4345.61,2496.64 4137.04,2496.64 C?.2@4100.21,2533.47 ; C?.2@4269.89,2828.75 4326.58,2828.75 4357.21,2798.13 4683.76,2798.13 C?.2@4733.28,2847.65
NetD?_1: D?.1@4044.3,3419.3 P?.4@3630.91,3333.87 | length 551
  Top Layer w10: P?.4@3630.91,3333.87 3736.12,3439.07 3736.12,3497.39 3740.22,3501.5 3875.94,3501.5 3890.81,3486.62 3976.98,3486.62 D?.1@4044.3,3419.3
NetF?_1: F?.1 P?.2@4861.23,2848.43 P?.4@4854.54,2502.37 | length 776.1
  Top Layer w10: P?.4@4854.54,2502.37 5028.55,2676.39 5028.55,2828.75 ; P?.2@4861.23,2848.43 4943.91,2848.43 4963.59,2828.75 5028.55,2828.75 ; F?.1@5225.4,2815.95 5212.61,2828.75 5028.55,2828.75
NetF?_2: F?.2 P?.1@5363.2,3086.62 | length 645.2
  Top Layer w10: F?.2@5225.4,3274.61 5119.21,3168.42 5095.34,3168.42 5075.09,3148.18 5075.09,3028.3 5087.61,3015.79 5292.36,3015.79 P?.1@5363.2,3086.62
NetLED_1: LED.1 mk20dx256vlh7.50 P?.14@5147.25,3937.02 | length 2054.5
  Top Layer w10: mk20dx256vlh7.50@4271.15,3524.89 4004.06,3524.89 LED.1@3808.08,3720.87 4010.72,3923.52 4010.72,3952.15 4032.12,3973.54 4062.38,3973.54 4110.72,3925.2 4110.72,3921.89 4134.97,3897.64 5107.87,3897.64 P?.14@5147.25,3937.02
NetLED_2: LED.2 R?.2@3729.34,3321.66 | length 158.2
  Top Layer w10: R?.2@3729.34,3321.66 3729.34,3368.51 LED.2@3808.08,3447.25
Netmk20dx256vlh7_1: mk20dx256vlh7.1 P?.5@4206.31,2322.84 | length 3051.2
  Top Layer w10: v1(4288.2,3129.93) 4329.3,3171.03 mk20dx256vlh7.1@4349.42,3171.03
  Bottom Layer w10: P?.5@4206.31,2322.84 4219.21,2309.94 4267.55,2309.94 4303.18,2274.31 4809.44,2274.31 4842.84,2307.71 4842.84,2337.97 4797.44,2383.37 4782.23,2383.37 4770.23,2371.37 4643.38,2371.37 4631.38,2383.37 4550.76,2383.37 4541.07,2373.68 4531.38,2383.37 4481.24,2383.37 4464.39,2366.52 4448.23,2366.52 4431.38,2383.37 4424.94,2383.37 4335.67,2472.64 4031.87,2472.64 4024.84,2479.67 4024.84,2496.64 3886.14,2635.34 3869.16,2635.34 3844.2,2660.31 3844.2,2677.28 3679.03,2842.44 3679.03,2889.07 3811.32,3021.35 4287.08,3021.35 4323.35,3057.62 4323.35,3094.78 v1(4288.2,3129.93)
Netmk20dx256vlh7_2: mk20dx256vlh7.2 P?.10@4706.31,2322.84 | length 2220.9
  Top Layer w10: v1(4251.97,3070.87) 4311.02,3070.87 4369.1,3128.94 mk20dx256vlh7.2@4369.1,3171.03
  Bottom Layer w10: v1(4251.97,3070.87) 4247.34,3066.24 3896.18,3066.24 3879.82,3082.6 3854.45,3082.6 3667.03,2895.18 3667.03,2837.47 3832.2,2672.31 3832.2,2655.34 3864.19,2623.34 3881.16,2623.34 4012.84,2491.67 4012.84,2474.7 4026.89,2460.64 4330.7,2460.64 4419.97,2371.37 4426.41,2371.37 4443.26,2354.52 4469.36,2354.52 4486.21,2371.37 4526.41,2371.37 4541.07,2356.71 4555.73,2371.37 4626.41,2371.37 4654.84,2342.94 4654.84,2325.49 4657.48,2322.84 P?.10@4706.31,2322.84
Netmk20dx256vlh7_5: mk20dx256vlh7.5 R?.2@4809.65,3133.87 | length 1803
  Top Layer w10: mk20dx256vlh7.5@4428.16,3171.03 4428.16,3222.45 4429.4,3222.45 4438.02,3231.07 4565.51,3231.07 4577.51,3243.07 4668.41,3243.07 4775.21,3136.26 4807.26,3136.26 R?.2@4809.65,3133.87
  Bottom Layer w10: R?.2@4809.65,3133.87 4809.65,3111.31 4946.14,3111.31 5051.37,3006.07 5051.37,2668.43 5074.42,2645.38 5121.23,2645.38 5154.84,2611.78 5154.84,2302.74 5126.41,2274.31 4931.79,2274.31
Netmk20dx256vlh7_6: mk20dx256vlh7.6 R?.2@4809.65,3055.13 | length 501.3
  Top Layer w10: mk20dx256vlh7.6@4447.84,3171.03 4447.84,3212.61 4454.31,3219.07 4570.48,3219.07 4582.48,3231.07 4663.44,3231.07 4681.6,3212.91 4681.6,3206.69 4735.14,3153.15 4735.14,3144.78 4776.1,3103.81 4776.1,3088.68 R?.2@4809.65,3055.13
Netmk20dx256vlh7_9: mk20dx256vlh7.9 P?.2@4654.54,2502.37 | length 1358.8
  Top Layer w10: v1(4457.69,3073.24) 4457.69,3096.66 4506.9,3145.88 mk20dx256vlh7.9@4506.9,3171.03
  Bottom Layer w10: v1(4457.69,3073.24) 4511.13,3019.79 4745.2,3019.79 4780.43,2984.57 4826.88,2984.57 4847.97,3005.66 4847.97,3010.63 4857.14,3019.79 4941.48,3019.79 4954.47,3006.81 4982.75,3006.81 5001.5,2988.07 5001.5,2849.33 P?.2@4654.54,2502.37